# Altium PCB SMASHBOY_AVI_ADC_PCB_PART2_V01.PcbDoc
Units mm, origin at the board's own origin, x right, y up, seen from the top; angles counter-clockwise.
Board outline 23 x 13 mm, 2 copper layers (Top Layer, Bottom Layer), stack 0.871 mm thick; 21 components, 17 nets, 92 pads, 20 vias.
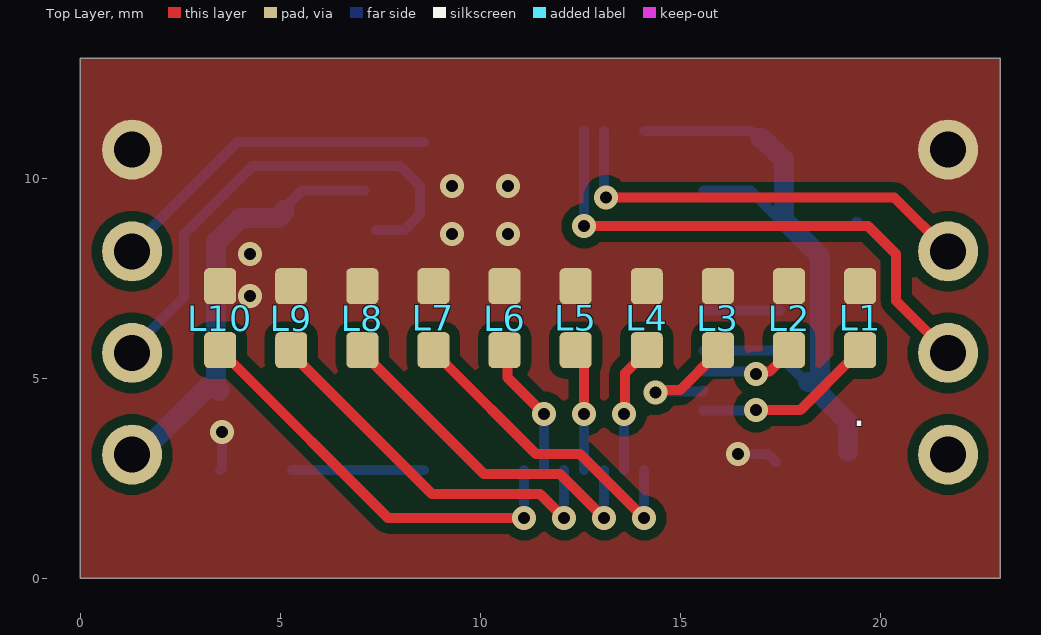
[diagram p0: Top Layer view]
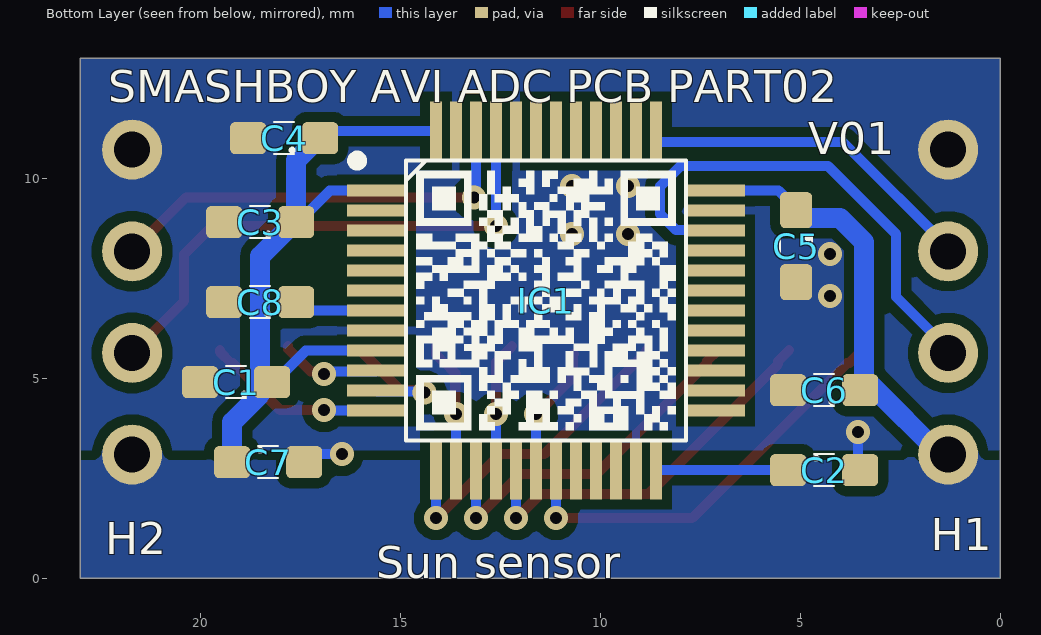
[diagram p1: Bottom Layer view, seen from below]
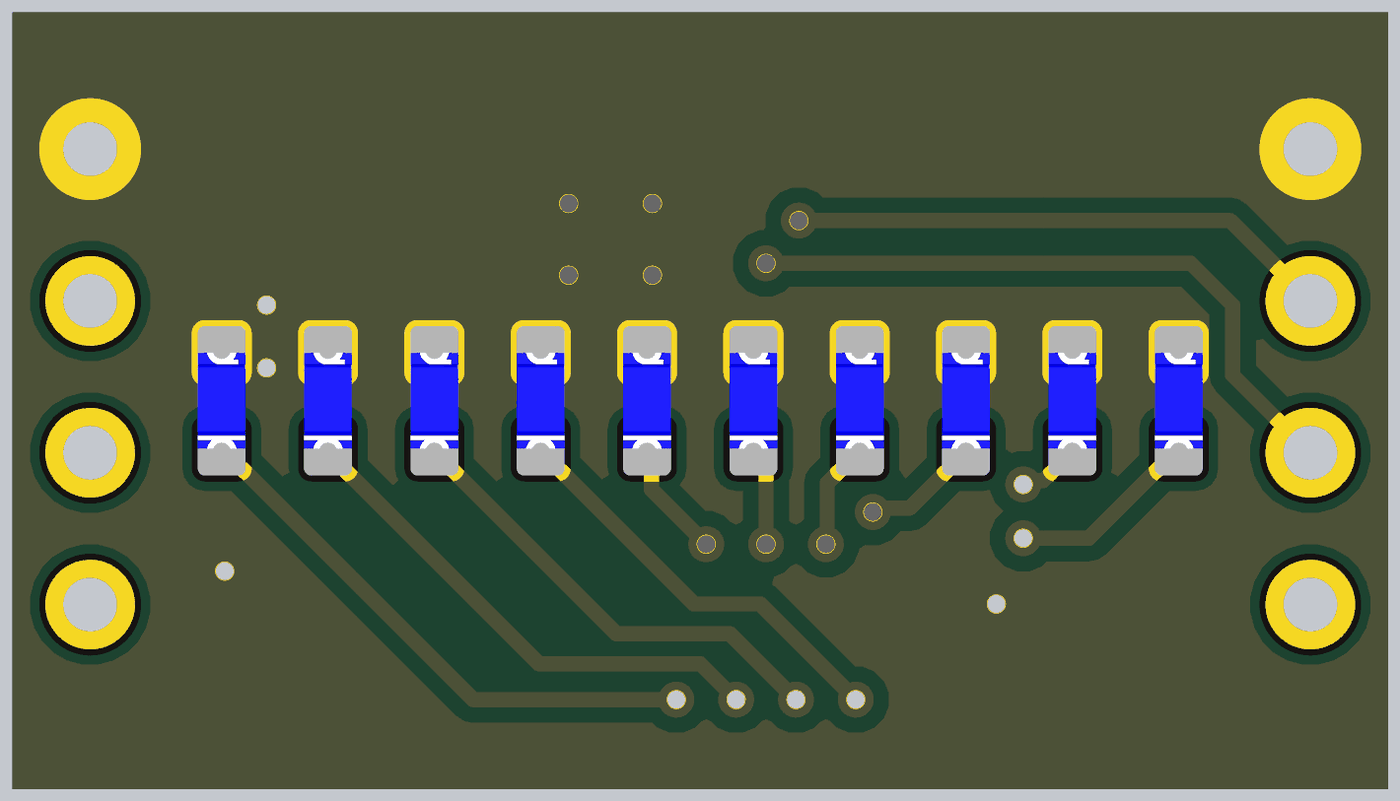
[diagram p2: 3D render of the assembled board from above, using the file's embedded part models]
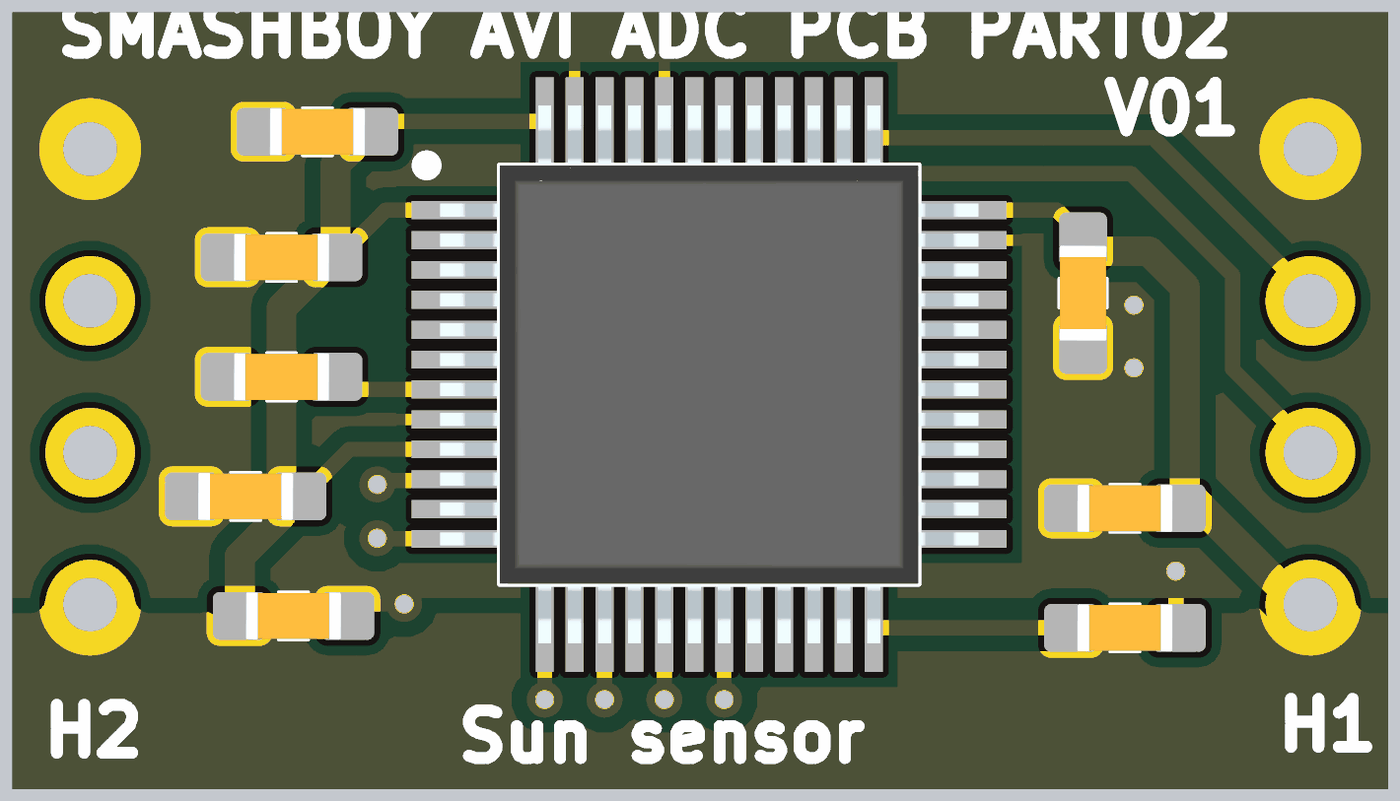
[diagram p3: 3D render of the assembled board from below, using the file's embedded part models]

## Layer stack, top to bottom
Top Solder: solder mask 0.0102, Solder Resist, Dk 3.5
Top Layer: signal copper 0.0356
Dielectric 1: dielectric 0.8, FR-4, Dk 4.8
Bottom Layer: signal copper 0.0356
Bottom Solder: solder mask 0.0102, Solder Resist, Dk 3.5

## Board outline
0,0 23,0 23,13 0,13

## Design rules (kind name [scope] priority, off if disabled: settings)
Clearance Clearance_Defferents [All] p1: gap=0.254 ignorepadtopadclearanceinfootprint=FALSE except(0.11: Arc-THPad Arc-Via Track-THPad Track-Via; 0.127: Arc-Arc Arc-Track Track-Track SMDPad-SMDPad; 0.2: Arc-SMDPad Track-SMDPad; 0.3: Via-Via; 0.5: SMDPad-THPad THPad-THPad)
HoleSize [All] p1: absolutevalues=TRUE maxlimit=6.3 minlimit=0.025 maxpercent=80.000 minpercent=20.000
HoleToHoleClearance [All] p1: gap=0.5 allowstackedmicrovias=TRUE
PlaneConnect [All] p1: planeconnectstyle=Direct reliefexpansion=0.508 reliefentries=4 reliefconductorwidth=0.254 reliefairgap=0.254
PolygonConnect [All] p1: connectstyle=Direct reliefconductorwidth=0.254 reliefentries=4 polygonreliefangle="45 Angle" airgapwidth=0.254
RoutingVias [All] p1: holewidth=0.4 width=0.8 viastyle="Through Hole" minholewidth=0.3 minwidth=0.6 maxholewidth=0.8 maxwidth=1.2
SolderMaskExpansion [All] p1: expansion=0.102 istentingtop=FALSE
Width [All] p1: maxlimit=3 minlimit=0.09 preferedwidth=0.127
27 further rules are at their usual default settings.

## Components (designator, comment, footprint, x,y, rotation, side; value= is the part's Value field where it differs from the comment)
C1 "4uF" CAP0603_060 19.1,4.9 r0 bottom
C2 "100nF" CAP0603_060 4.4,2.7 r180 bottom
C3 "100nF" CAP0603_060 18.5,8.9 r0 bottom
C4 "100nF" CAP0603_060 17.9,11 r0 bottom
C5 "100nF" CAP0603_060 5.1,8.3 r270 bottom
C6 "100nF" CAP0603_060 4.4,4.7 r0 bottom
C7 "100nF" CAP0603_060 18.3,2.9 r180 bottom
C8 "100nF" CAP0603_060 18.5,6.9 r0 bottom
H1 "Header 4P" Header-4P 1.3,6.9 r90 bottom
H2 "Header 4P" Header-4P 21.7,6.9 r90 bottom
IC1 "STM32F103C8" QFP-48N 11.35,6.938 r180 bottom locked
L1 "LED Azul" LED0603 19.5,6.5 r90 top
L2 "LED Azul" LED0603 17.722,6.5 r90 top
L3 "LED Azul" LED0603 15.944,6.5 r90 top
L4 "LED Azul" LED0603 14.167,6.5 r90 top
L5 "LED Azul" LED0603 12.389,6.5 r90 top
L6 "LED Azul" LED0603 10.611,6.5 r90 top
L7 "LED Azul" LED0603 8.833,6.5 r90 top
L8 "LED Azul" LED0603 7.056,6.5 r90 top
L9 "LED Azul" LED0603 5.278,6.5 r90 top
L10 "LED Azul" LED0603 3.5,6.5 r90 top

## Footprints (in the part's own frame and the unit in brackets; to place one, negate y for a bottom-side part, rotate by r counter-clockwise, add the part's x,y. Pads: shape width x height; smd on the part's side, far side on the other; paste and mask are expansions set on the pad)
CAP0603_060 [mm]
  rrect30% 0.9x0.8 smd: 1(-0.9,0) 2(0.9,0)
  silkscreen extent -0.25,-0.4 0.25,0.4, body extent -0.8,-0.4 0.8,0.4, height 0.6
Header-4P [mm]
  round 1.5 hole 0.9: 1(-3.81,0) 2(-1.27,0) 3(1.27,0) 4(3.81,0)
LED0603 [mm]
  rrect30% 0.9x0.8 smd: 1(-0.8,0) 2(0.8,0)
  body extent -0.8,-0.4 0.8,0.4, height 0.36
QFP-48N [mm]
  rect 1.475x0.3 smd: 1(-4.238,2.75) 2(-4.238,2.25) 3(-4.238,1.75) 4(-4.238,1.25) 5(-4.238,0.75) 6(-4.238,0.25) 7(-4.238,-0.25) 8(-4.238,-0.75) 9(-4.238,-1.25) 10(-4.238,-1.75) 11(-4.238,-2.25) 12(-4.238,-2.75) 25(4.238,-2.75) 26(4.238,-2.25) 27(4.238,-1.75) 28(4.238,-1.25) 29(4.238,-0.75) 30(4.238,-0.25) 31(4.238,0.25) 32(4.238,0.75) 33(4.238,1.25) 34(4.238,1.75) 35(4.238,2.25) 36(4.238,2.75)
  rect 0.3x1.475 smd: 13(-2.75,-4.238) 14(-2.25,-4.238) 15(-1.75,-4.238) 16(-1.25,-4.238) 17(-0.75,-4.238) 18(-0.25,-4.238) 19(0.25,-4.238) 20(0.75,-4.238) 21(1.25,-4.238) 22(1.75,-4.238) 23(2.25,-4.238) 24(2.75,-4.238) 37(2.75,4.238) 38(2.25,4.238) 39(1.75,4.238) 40(1.25,4.238) 41(0.75,4.238) 42(0.25,4.238) 43(-0.25,4.238) 44(-0.75,4.238) 45(-1.25,4.238) 46(-1.75,4.238) 47(-2.25,4.238) 48(-2.75,4.238)
  silkscreen extent -4.85,-3.5 3.5,3.62, body extent -4.5,-4.5 4.5,4.5, height 1.6

## Part data
C1 C2 C3 C4 C5 C6 C7 C8: library part CAP0603, "Capacitor SDM 0603"
H1 H2: library part Header-4P, "Header 4 Pinos"
IC1: "Medium-density performance line ARM-based 32-bit MCU. / 72 MHz, 5 V-tolerant. / 48 Pin"
L1 L2 L3 L4 L5 L6 L7 L8 L9 L10: library part LED0603, "LED SMD 0603"

## Via types
v1: diameter 0.6, hole 0.3, Top Layer to Bottom Layer, tented both sides, 20 vias

## Nets (pads, with @x,y where several pads share a name; then routed paths per layer and width w, separated by ;. In a path a pad name is that pad's centre, name@x,y a point inside that pad or via, vN(x,y) a via of type N, cw(c..) or ccw(c..) an arc to the next point about the centre after c; other vN are vias at no path point)
3V3: C1.1 C2.1 C3.1 C4.1 C5.1 C6.1 C7.1 H1.1 H2.1 IC1.1 IC1.9 IC1.24 IC1.36 IC1.48 | length 30.8
  Bottom Layer w0.254: C5.1@5.1,9.25 5.538,9.688 IC1.36 ; C2.1 IC1.24 ; IC1.48 C4.1@16.769,11.176 ; IC1.9 17.362,5.688 C1.1@18.05,5 ; IC1.1 16.762,9.688 17.55,8.9 C3.1 ; H2.1@21.6,2.9 H2.1@21.8,3.1
  Bottom Layer w0.5: H1.1 1.49,3.09 C6.1@3.2,4.8 ; C6.1@3.45,4.7 3.4,4.75 3.4,8.4 4,9 4.95,9 5.1,9.15 C5.1 ; C6.1@3.475,4.675 C6.1 ; C4.1 17.05,11 17.6,10.45 C3.1@17.6,8.95 ; C3.1 C3.1@17.6,8.95 ; C1.1 C1.1@18.25,4.9 ; C7.1@19.2,3.161 19.2,3.9 18.5,4.6 18.5,8.05 C3.1@17.6,8.95
GND: C1.2 C2.2 C3.2 C4.2 C5.2 C6.2 C7.2 C8.2 H1.4 H2.4 IC1.8 IC1.23 IC1.35 IC1.44 IC1.47 L1.2 L2.2 L3.2 L4.2 L5.2 L6.2 L7.2 L8.2 L9.2 L10.2 | length 2
  Bottom Layer w0.254: C2.2 3.55,2.75 v1(3.55,3.65) ; v1(16.45,3.1) 17.2,3.1 C7.2 ; C3.2 C3.2@19.427,8.9
  other v1: 4.25,7.05 4.25,8.1 9.3,8.6 10.7,8.6 9.3,9.8 10.7,9.8
NetC8_1: C8.1 IC1.7 | length 1.9
  Bottom Layer w0.254: IC1.7 C8.1@17.5,6.688
NetH1_2: H1.2 IC1.34 | length 12.3
  Bottom Layer w0.254: H1.2@1.2,5.63 2.6,7.03 2.6,8.6 4.3,10.3 8,10.3 8.5,9.8 8.5,9.1 8.1,8.7 IC1.34@7.4,8.7
NetH1_3: H1.3 IC1.37 | length 8.5
  Bottom Layer w0.254: H1.3@1.2,8.17 3.93,10.9 IC1.37@8.6,10.9
NetH2_2: H2.2 IC1.45 | length 13.5
  Top Layer w0.254: v1(12.6,8.8) 19.7,8.8 20.4,8.1 20.4,6.93 H2.2
  Bottom Layer w0.254: v1(12.6,8.8) IC1.45
NetH2_3: H2.3 IC1.46 | length 10.8
  Top Layer w0.254: v1(13.148,9.514) 20.356,9.514 H2.3
  Bottom Layer w0.254: IC1.46 13.1,9.562 v1(13.148,9.514)
NetIC1_10: IC1.10 L2.1 | length 2.6
  Top Layer w0.254: v1(16.9,5.1) 16.966,5.166 17.238,5.166 17.8,5.728 L2.1@17.8,5.8
  Bottom Layer w0.254: IC1.10 15.611,5.165 16.835,5.165 v1(16.9,5.1)
NetIC1_11: IC1.11 L3.1 | length 3.3
  Top Layer w0.254: v1@14.4,4.6 14.505,4.705 14.999,4.705 15.944,5.65 L3.1
  Bottom Layer w0.254: v1(14.385,4.639) 14.412,4.665 15.565,4.665 IC1.11
NetIC1_12: IC1.12 L1.1 | length 4.6
  Top Layer w0.254: v1(16.9,4.2) 18,4.2 19.177,5.377 19.227,5.377 19.5,5.65 L1.1
  Bottom Layer w0.254: IC1.12 15.594,4.194 16.894,4.194 v1(16.9,4.2)
NetIC1_13: IC1.13 L7.1 | length 8.2
  Top Layer w0.254: L7.1 8.833,5.65 9.106,5.377 9.123,5.377 11.4,3.1 12.5,3.1 v1(14.1,1.5)
  Bottom Layer w0.254: v1(14.1,1.5) IC1.13
NetIC1_14: IC1.14 L4.1 | length 3.3
  Top Layer w0.254: v1(13.6,4.1) 13.622,4.122 13.622,5.122 13.877,5.377 13.894,5.377 14.1,5.583 L4.1@14.1,5.8
  Bottom Layer w0.254: IC1.14 v1(13.6,4.1)
NetIC1_15: IC1.15 L8.1 | length 9
  Top Layer w0.254: L8.1 7.328,5.427 7.328,5.372 10.1,2.6 12,2.6 v1(13.1,1.5)
  Bottom Layer w0.254: v1(13.1,1.5) IC1.15
NetIC1_16: IC1.16 L5.1 | length 3.3
  Top Layer w0.254: L5.1@12.2,5.8 12.6,5.4 v1(12.6,4.1)
  Bottom Layer w0.254: IC1.16 v1(12.6,4.1)
NetIC1_17: IC1.17 L9.1 | length 9.8
  Top Layer w0.254: L9.1 5.551,5.427 5.551,5.349 8.8,2.1 11.5,2.1 v1(12.1,1.5)
  Bottom Layer w0.254: v1(12.1,1.5) IC1.17
NetIC1_18: IC1.18 L6.1 | length 3.3
  Top Layer w0.254: L6.1@10.661,5.6 10.682,5.579 10.682,5.018 v1(11.6,4.1)
  Bottom Layer w0.254: IC1.18 v1(11.6,4.1)
NetIC1_19: IC1.19 L10.1 | length 10.6
  Top Layer w0.254: L10.1 3.5,5.65 3.773,5.377 3.823,5.377 7.7,1.5 v1(11.1,1.5)
  Bottom Layer w0.254: v1(11.1,1.5) IC1.19
pads on no net: IC1.2 IC1.3 IC1.4 IC1.5 IC1.6 IC1.20 IC1.21 IC1.22 IC1.25 IC1.26 IC1.27 IC1.28 IC1.29 IC1.30 IC1.31 IC1.32 IC1.33 IC1.38 IC1.39 IC1.40 IC1.41 IC1.42 IC1.43

## Polygon pours and split planes (outlines as drawn)
GND on Top Layer "NONET_L-01_P-001" (solid, remove dead copper, pour order 0): 0,13 0,0 23,0 23,13
3V3 on Bottom Layer "NONET_L-01_P-001" (solid, remove dead copper, pour order 2): 0,3.2 0,0 23,0 23,3.2
GND on Bottom Layer "NONET_L-01_P-001" (solid, remove dead copper, pour order 1): 0,13 23,13 23,3.2 0,3.2

## Other copper
Bottom Layer:
  pour cut-out: 8.2,3.624 8.2,1.71 8.75,1.71

## Silkscreen, mask and mechanical layers (free items; w line width, h text height)
Top Overlay:
  text "." at 19.3,3.8 h0.8
Bottom Overlay:
  drawing of 38 lines, arcs and shapes, not listed
  text "SMASHBOY AVI ADC PCB PART02" at 22.3,11.9 h0.8
  text "V01" at 4.8,10.6 h0.8
  text "Sun sensor" at 15.6,0 h0.8
Temp:
  lines w0.2: 0,6.5 23,6.5 ; 11.5,0 11.5,13